# EAGLE board qPCR_pcb_breakout_TLC5940PWPR (EAGLE 9.6.1)
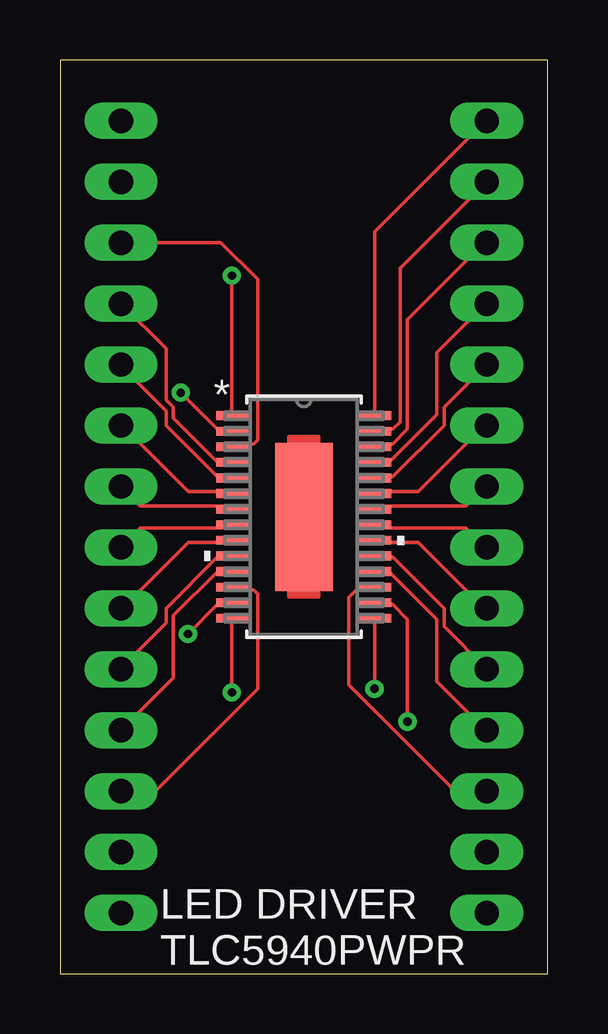
[diagram p0: board, top side]
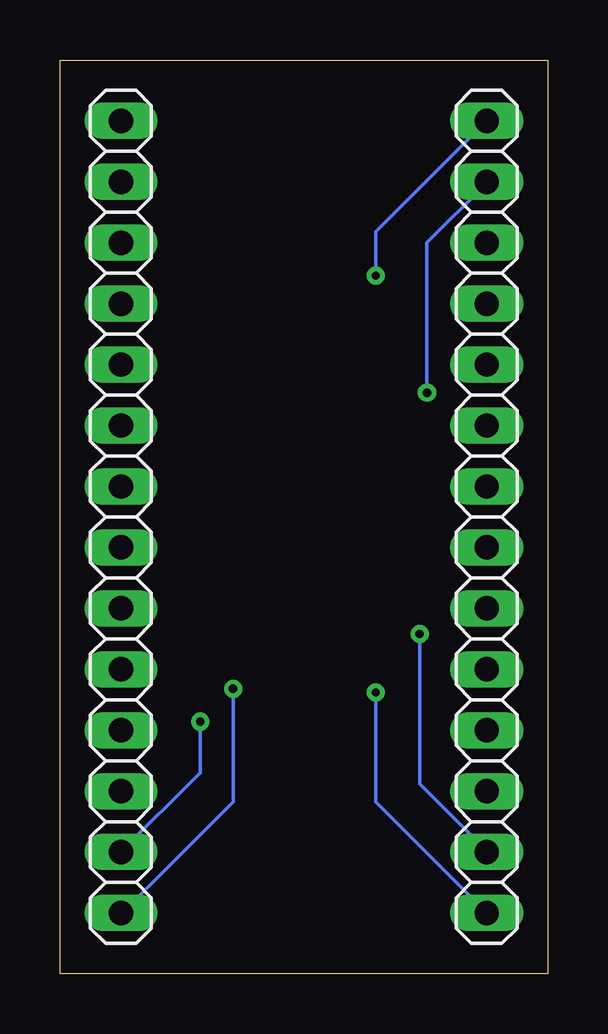
[diagram p1: board, bottom side, seen from below]

Size 20.32 x 38.1 mm. Coordinates in mm from the lower left corner, seen from the top.
Outline: 0,0 20.32,0 20.32,38.1 0,38.1 0,0
Copper layers (1*16): Top 0.035mm / dielectric 1.5mm / Bottom 0.035mm
Design rules "default": minimum track width 6mil, minimum drill 0.35mm, track to track 6mil, track to pad 6mil, pad to pad 6mil, via to via 6mil, smd to smd 6mil, copper to edge 40mil, drill to drill 6mil, minimum pad ring 10mil, minimum via ring 8mil, stop-mask expansion 4mil, vias tented up to drill 0mil, thermal gap 10mil

## Footprints (pad centres in the part's own frame; a part is rotated, then mirrored left to right if it is on the bottom)
1X14 = drill 1.016 long: 1 -16.51,0; 2 -13.97,0; 3 -11.43,0; 4 -8.89,0; 5 -6.35,0; 6 -3.81,0; 7 -1.27,0; 8 1.27,0; 9 3.81,0; 10 6.35,0; 11 8.89,0; 12 11.43,0; 13 13.97,0; 14 16.51,0
PWP28_6P17X2P4 = smd 1.462 x 0.365: 1 -2.921,4.225; 2 -2.921,3.575; 3 -2.921,2.925; 4 -2.921,2.275; 5 -2.921,1.625; 6 -2.921,0.975; 7 -2.921,0.325; 8 -2.921,-0.325; 9 -2.921,-0.975; 10 -2.921,-1.625; 11 -2.921,-2.275; 12 -2.921,-2.925; 13 -2.921,-3.575; 14 -2.921,-4.225; 15 2.921,-4.225; 16 2.921,-3.575; 17 2.921,-2.925; 18 2.921,-2.275; 19 2.921,-1.625; 20 2.921,-0.975; 21 2.921,-0.325; 22 2.921,0.325; 23 2.921,0.975; 24 2.921,1.625; 25 2.921,2.275; 26 2.921,2.925; 27 2.921,3.575; 28 2.921,4.225 | smd 2.4 x 6.17: 29 0,0

## Placement (x,y rotation side)
JP1  [1X14]  2.54,19.05 270 bottom
JP2  [1X14]  17.78,19.05 270 bottom
U1  TLC5940PWPR  [PWP28_6P17X2P4]  10.16,19.05 0 top

## Library data of the parts
JP1 JP2 = pinhead
U1 = Ninja_qPCR; BUILT_BY: EMA_UL_Team; MANUFACTURER: Texas Instruments; MANUFACTURER_PART_NUMBER: TLC5940PWPR; SOURCELIBRARY: TI_2014-06-19; VENDOR: Texas Instruments

## Nets
1: JP1.1 U1.1
2: JP1.2 U1.2
3: JP1.3 U1.3
4: JP1.4 U1.4
5: JP1.5 U1.5
6: JP1.6 U1.6
7: JP1.7 U1.7
8: JP1.8 U1.8
9: JP1.9 U1.9
10: JP1.10 U1.10
11: JP1.11 U1.11
12: JP1.12 U1.12
13: JP1.13 U1.13
14: JP1.14 U1.14
15: JP2.14 U1.15
16: JP2.13 U1.16
17: JP2.12 U1.17
18: JP2.11 U1.18
19: JP2.10 U1.19
20: JP2.9 U1.20
21: JP2.8 U1.21
22: JP2.7 U1.22
23: JP2.6 U1.23
24: JP2.5 U1.24
25: JP2.4 U1.25
26: JP2.3 U1.26
27: JP2.2 U1.27
28: JP2.1 U1.28
29: U1.29

## Tracks (layer width: path | path; a pad name or v marks a point on that pad's centre or on a via)
1  (via drill 0.35)
  Top 0.152: v7.16,29.11 7.16,23.32 U1.1
  Bottom 0.152: v7.16,29.11 7.16,30.94 JP1.1
2  (via drill 0.35)
  Top 0.152: v5.03,24.23 6.55,22.71 7.16,22.71 U1.2
  Bottom 0.152: v5.03,24.23 5.03,30.48 2.59,32.92 JP1.2
3
  Top 0.152: JP1.3 6.71,30.48 8.23,28.96 8.23,22.25 8.08,22.1 7.32,22.1 U1.3
4
  Top 0.152: JP1.4 4.42,26.06 4.42,23.93 4.72,23.62 4.72,23.16 6.55,21.34 7.16,21.34 U1.4
5
  Top 0.152: U1.5 7.16,20.73 6.55,20.73 4.42,22.86 4.42,23.47 2.59,25.3 JP1.5
6
  Top 0.152: U1.6 7.16,20.12 5.33,20.12 2.59,22.86 JP1.6
7
  Top 0.152: JP1.7 3.35,19.51 7.16,19.51 U1.7
8
  Top 0.152: JP1.8 3.35,18.59 7.16,18.59 U1.8
9
  Top 0.152: U1.9 7.16,17.98 5.33,17.98 2.59,15.24 JP1.9
10
  Top 0.152: U1.10 7.16,17.37 6.55,17.37 4.42,15.24 4.42,14.63 2.59,12.8 JP1.10
11
  Top 0.152: JP1.11 4.72,12.34 4.72,14.94 6.55,16.76 7.16,16.76 U1.11
12
  Top 0.152: JP1.12 3.96,7.62 8.23,11.89 8.23,15.85 8.08,16 7.32,16 U1.12
13  (via drill 0.35)
  Top 0.152: v5.33,14.17 6.55,15.39 7.16,15.39 U1.13
  Bottom 0.152: v5.33,14.17 5.33,7.92 2.59,5.18 JP1.13
14  (via drill 0.35)
  Top 0.152: v7.16,11.73 7.16,14.78 U1.14
  Bottom 0.152: v7.16,11.73 7.16,7.16 JP1.14
15  (via drill 0.35)
  Top 0.152: v13.11,11.89 13.11,14.78 U1.15
  Bottom 0.152: v13.11,11.89 13.11,7.16 17.68,2.59 JP2.14
16  (via drill 0.35)
  Top 0.152: v14.48,10.52 14.48,14.78 13.87,15.39 13.11,15.39 U1.16
  Bottom 0.152: v14.48,10.52 14.48,8.38 JP2.13
17
  Top 0.152: JP2.12 16.46,7.62 12.04,12.04 12.04,15.7 12.34,16 12.95,16 U1.17
18
  Top 0.152: U1.18 13.11,16.76 13.72,16.76 15.7,14.78 15.7,12.19 17.68,10.21 JP2.11
19
  Top 0.152: JP2.10 16,14.48 16,15.24 13.87,17.37 13.11,17.37 U1.19
20
  Top 0.152: U1.20 13.11,17.98 14.94,17.98 17.68,15.24 JP2.9
21
  Top 0.152: U1.21 13.11,18.59 16.92,18.59 17.68,17.83 JP2.8
22
  Top 0.152: U1.22 13.11,19.51 16.92,19.51 17.68,20.27 JP2.7
23
  Top 0.152: U1.23 13.11,20.12 14.94,20.12 17.68,22.86 JP2.6
24
  Top 0.152: JP2.5 16,23.62 16,22.86 13.87,20.73 13.11,20.73 U1.24
25
  Top 0.152: U1.25 13.11,21.34 13.72,21.34 15.7,23.32 15.7,25.91 17.68,27.89 JP2.4
26
  Top 0.152: U1.26 13.11,22.1 13.87,22.1 14.48,22.71 14.48,27.28 17.68,30.48 JP2.3
27
  Top 0.152: JP2.2 14.17,29.41 14.17,23.01 13.87,22.71 13.11,22.71 U1.27
28
  Top 0.152: U1.28 13.11,23.32 13.11,30.94 17.68,35.51 JP2.1

## Text on the board
tPlace: LED DRIVER / TLC5940PWPR